# Altium PCB Mosfet_Driver_Circuit.PcbDoc
Units mm, origin at the board's own origin, x right, y up, seen from the top; angles counter-clockwise.
Board outline 99.57 x 123 mm, 2 copper layers (Top Layer, Bottom Layer); 76 components, 34 nets, 233 pads, 377 vias.
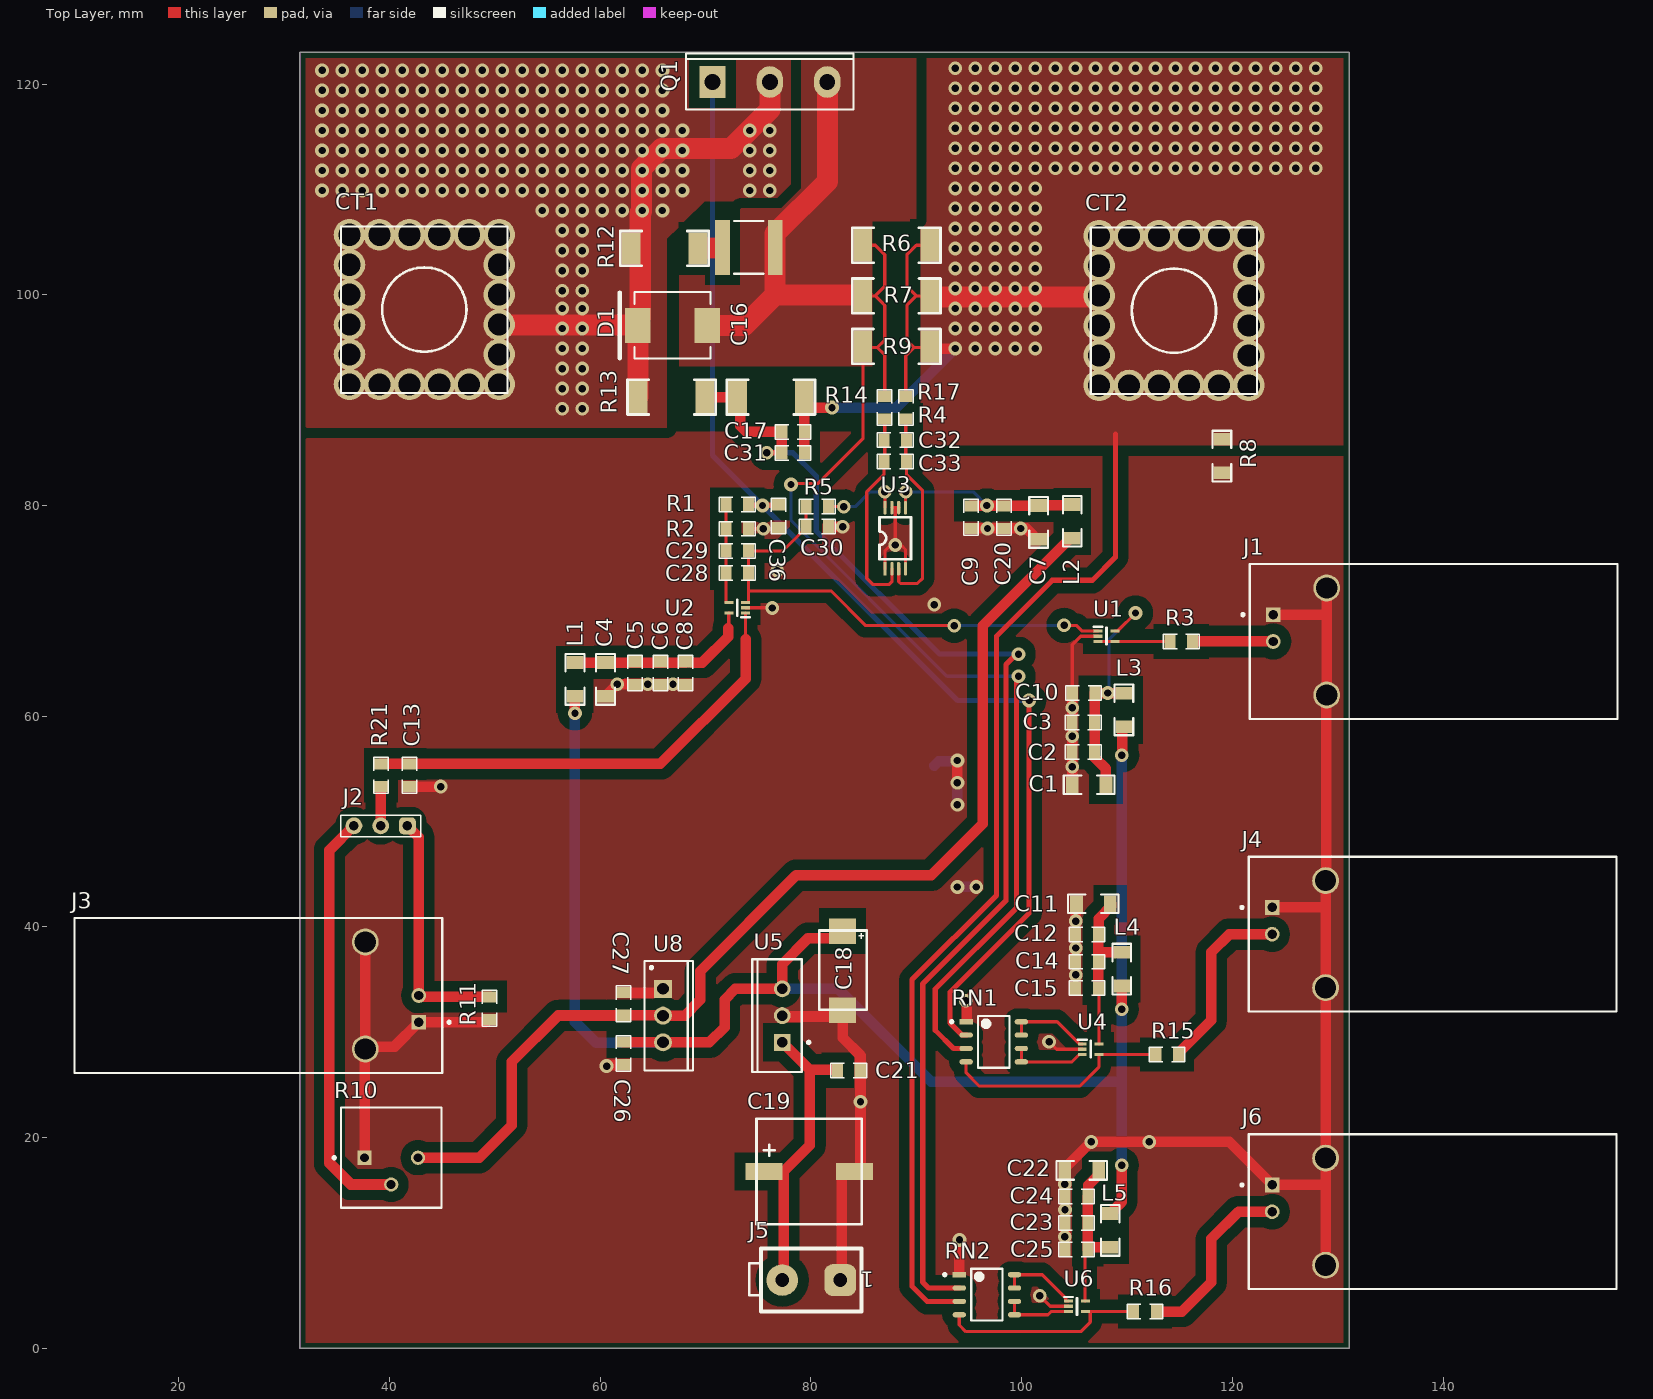
[diagram p0: Top Layer view]
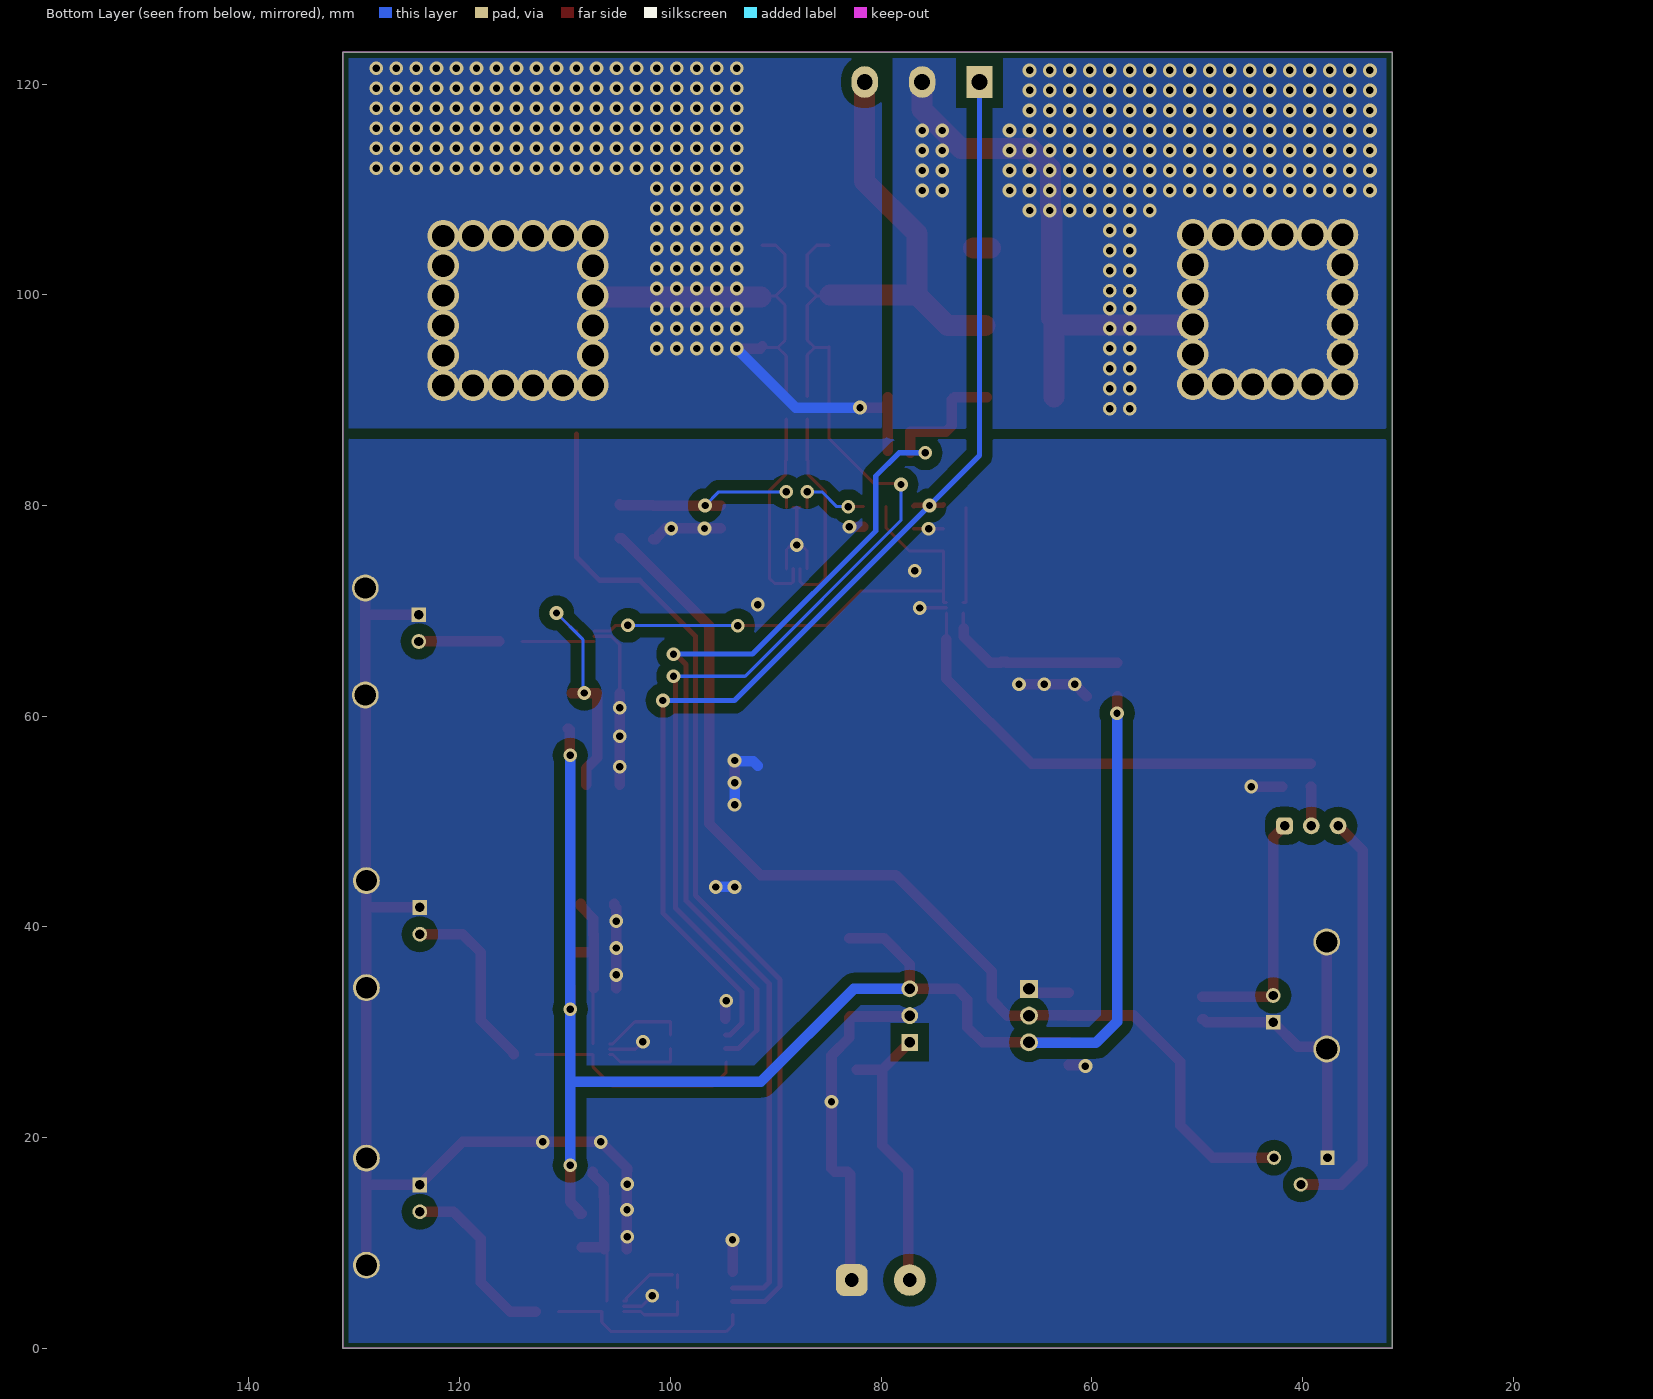
[diagram p1: Bottom Layer view, seen from below]
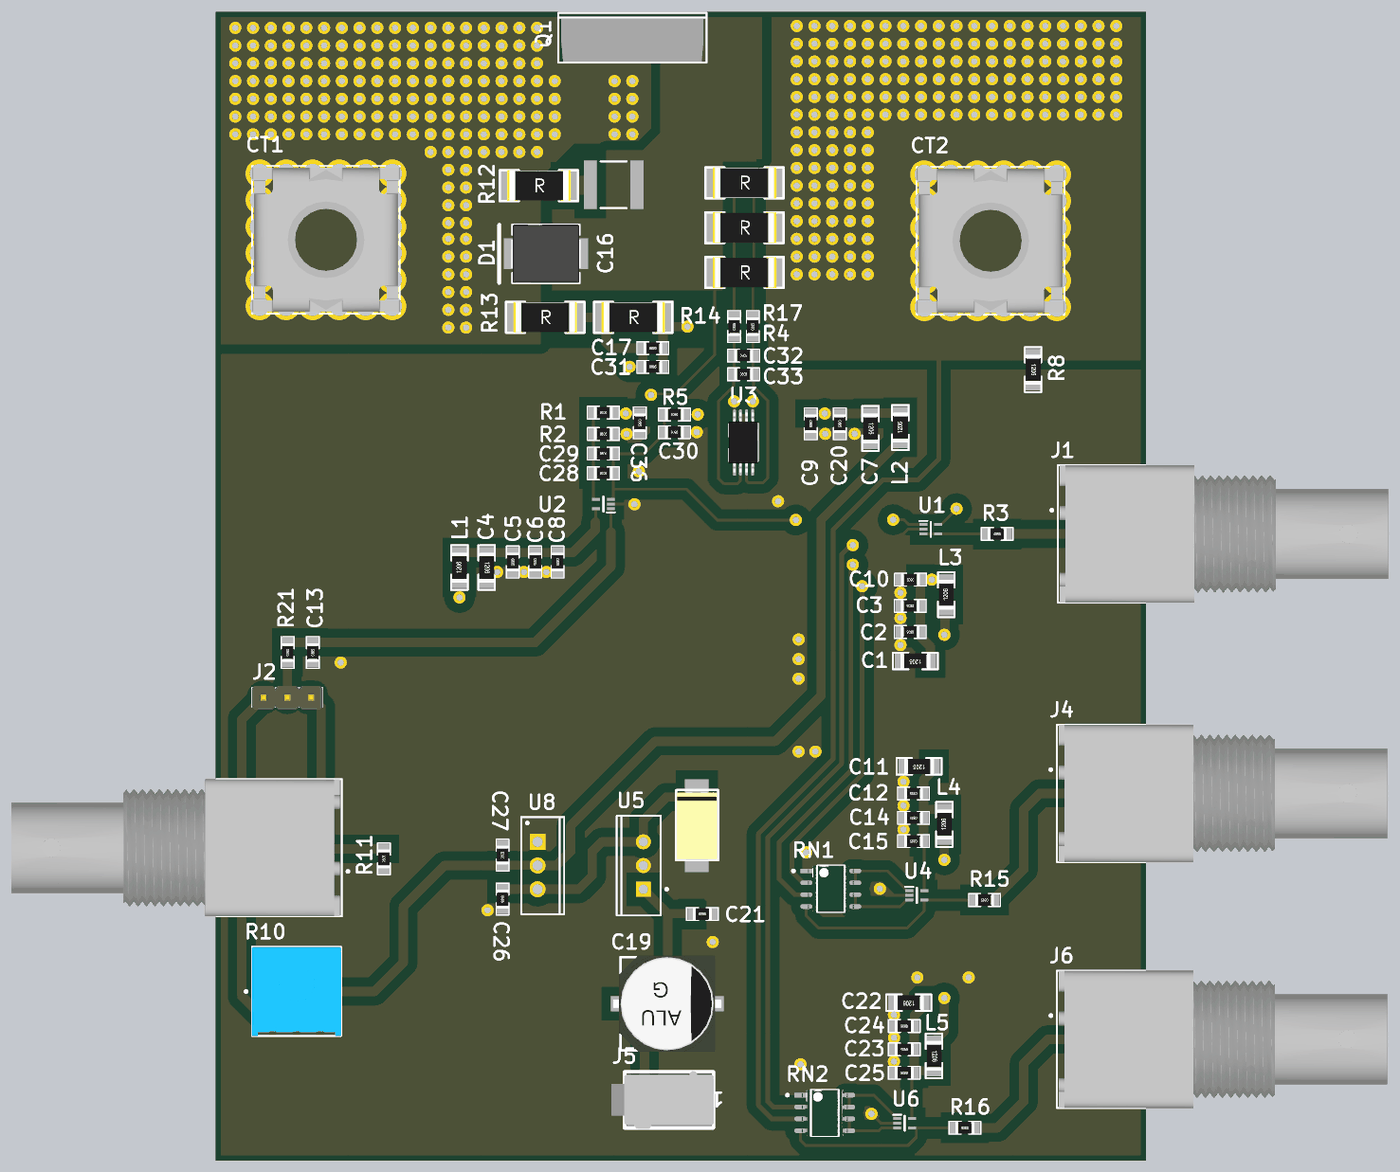
[diagram p2: 3D render of the assembled board from above, using the file's embedded part models]

## Layer stack, top to bottom
Top Solder: solder mask 0.0102, Solder Resist, Dk 3.5
Top Layer: signal copper 0.0356
Dielectric 1: dielectric 0.32, FR-4, Dk 4.8
Bottom Layer: signal copper 0.0356
Bottom Solder: solder mask 0.0102, Solder Resist, Dk 3.5

## Board outline
31.5,0 31.5,123 131.074,123 131.074,0

## Design rules (kind name [scope] priority, off if disabled: settings)
Clearance Keep-Poly [(OnLayer('Keep-Out Layer')) vs (InPoly)] p1: gap=0.5 ignorepadtopadclearanceinfootprint=FALSE
Clearance Polygon [All vs (InPoly)] p2: gap=1 ignorepadtopadclearanceinfootprint=FALSE
Clearance Keepout [All vs (OnLayer('Keep-Out Layer'))] p3: gap=0.5 ignorepadtopadclearanceinfootprint=FALSE
Clearance [All] p4: gap=0.2 ignorepadtopadclearanceinfootprint=FALSE
ComponentClearance [All] p1: gap=0.1 collisioncheckmode=3 verticalgap=0.2 showdistances=FALSE
FabricationTestPointUsage TestPointUsage [All] p1: valid=0 allowmultiple=FALSE
FabricationTestpoint Testpoint [All] p1: side=3 testpointundercomponent=TRUE minsize=1.016 maxsize=2.54 preferedsize=1.524 minholesize=0 maxholesize=1.016 preferedholesize=0.813 testpointgrid=0.025 allowsidetop=TRUE allowsidebottom=TRUE usegrid=TRUE gridtolerance=0
HoleSize [All] p1: absolutevalues=TRUE maxlimit=3.5 minlimit=0 maxpercent=80.000 minpercent=20.000
PlaneClearance [All] p1: clearance=1
PlaneConnect [All] p1: planeconnectstyle=Direct reliefexpansion=0.508 reliefentries=4 reliefconductorwidth=0.254 reliefairgap=0.254
PolygonConnect PolygonConnect_1 [InNet('BAT+')] p1: connectstyle=Direct reliefconductorwidth=0.254 reliefentries=4 polygonreliefangle="90 Angle" airgapwidth=0.254
PolygonConnect [All] p2: connectstyle=Direct reliefconductorwidth=0.8 reliefentries=4 polygonreliefangle="90 Angle" airgapwidth=0.254
RoutingVias [All] p1: holewidth=0.3 width=0.6 viastyle="Through Hole" minholewidth=0.3 minwidth=0.6 maxholewidth=0.8 maxwidth=1.3
SolderMaskExpansion [(IsVia)] p1: expansion=-10 istentingtop=FALSE
Width SGND [InNet('SGND')] p1: maxlimit=2 minlimit=0.3 preferedwidth=0.5 minimp=50.000000 maximp=50.000000 favimp=50.000000
Width PGND [InNet('PGND')] p2: maxlimit=3 minlimit=0.5 preferedwidth=0.5 minimp=50.000000 maximp=50.000000 favimp=50.000000
Width [All] p3: maxlimit=2 minlimit=0.2 preferedwidth=0.2 minimp=50.000000 maximp=50.000000 favimp=50.000000
24 further rules are at their usual default settings.

## Components (designator, comment, footprint, x,y, rotation, side; value= is the part's Value field where it differs from the comment)
C1 "10uF X7R 50V" 1206 106.4,53.5 r180 top
C2 "100nF X7R 100V" 0805 105.85,56.6 r180 top
C3 "1nF X7R 50V" 0805 105.85,59.4 r180 top
C4 "10uF X7R 50V" 1206 60.5,63.5 r270 top
C5 "100nF X7R 100V" 0805 63.3,64.1 r270 top
C6 "1nF X7R 50V" 0805 65.7,64.1 r270 top
C7 "10uF 50V" 1206 101.6,78.4 r270 top
C8 "10pF C0G" 0805 68.1,64.1 r270 top
C9 "100nF 100V" 0805 95.2,78.9 r270 top
C10 "10pF C0G" 0805 105.875,62.204 r180 top
C11 "10uF X7R 50V" 1206 106.8,42.2 r180 top
C12 "100nF X7R 100V" 0805 106.2,39.3 r180 top
C13 "100nF X7R 50V" 0805 41.9,54.4 r90 top
C14 "1nF X7R 50V" 0805 106.2,36.7 r180 top
C15 "10pF C0G" 0805 106.2,34.2 r180 top
C16 "3.3uF X7R 250V" 2220 74.1,104.5 r0 top
C17 "100nF X7R 100V" 0805 78.3,87 r0 top
C18 "22uF 25V" TANT_D 83,35.85 r90 top
C19 "220uF 50V" C_G55 79.83,16.791 r180 top
C20 "10pF" 0805 98.3,78.9 r270 top
C21 "1uF X7R 25V" 0805 83.6,26.4 r0 top
C22 "10uF X7R 50V" 1206 105.7,16.9 r180 top
C23 "100nF X7R 100V" 0805 105.2,11.9 r180 top
C24 "1nF X7R 50V" 0805 105.2,14.4 r180 top
C25 "10pF C0G" 0805 105.2,9.4 r180 top
C26 "100nF X7R 50V" 0805 62.2,28 r270 top
C27 "10uF X5R 10V" 0805 62.2,32.7 r90 top
C28 "1nF X7R 50V" 0805 73,73.6 r0 top
C29 "10pF C0G" 0805 73,75.7 r0 top
C30 "1nF X7R 50V" 0805 80.6,78 r180 top
C31 "1nF X7R 50V" 0805 78.3,85 r0 top
C32 "1nF X7R 50V" 0805 88,86.2 r0 top
C33 "10pF" 0805 88,84.2 r0 top
C36 "1nF X7R 50V" 0805 76.9,79 r270 top
CT1 "POWERPLUS F-M8" "PowerPlus M8" 43.3,98.6 r0 top
CT2 "POWERPLUS F-M8" "PowerPlus M8" 114.45,98.5 r0 top
D1 "SMCJ15A" LFUS-DO-214AB-2_V 66.85,97.1 r180 top
J1 "1-1337543-0" TECO-1-1337543-0_V 128.95,67.1 r270 top
J2 "STRIP-3" SIP-3 39.16,49.6 r180 top
J3 "1-1337543-0" TECO-1-1337543-0_V 37.7,33.5 r90 top
J4 "1-1337543-0" TECO-1-1337543-0_V 128.85,39.32 r270 top
J5 "M_FIT1X2" M_FIT_JR1X2V 80.03,6.491 r90 top
J6 "1-1337543-0" TECO-1-1337543-0_V 128.85,12.98 r270 top
L1 "80R 3A" 1206 57.6,63.5 r90 top
L2 "80R 3A" 1206 104.8,78.5 r90 top
L3 "80R 3A" 1206 109.7,60.6 r90 top
L4 "80R 3A" 1206 109.5,36 r90 top
L5 "80R 3A" 1206 108.4,11.2 r270 top
Q1 "IXTK90N25L2" TO-247 76.1,120.2 r0 top
R1 "100R" 0805 73,80.1 r0 top
R2 "47K" 0805 73,77.8 r0 top
R3 "50R" 0805 115.15,67.1 r180 top
R4 "100R" 0805 87,89.3 r90 top
R5 "100R" 0805 80.6,79.9 r180 top
R6 "5 mR" 2512 88.1,104.7 r0 top
R7 "5 mR" 2512 88.1,99.9 r0 top
R8 "10R" 1206 119,84.7 r270 top
R9 "5 mR" 2512 88.1,95.1 r0 top
R10 "3386P-1-104LF" BOUR-3386P 40.16,16.83 r0 top
R11 "47K" 0805 49.5,32.3 r90 top
R12 "1R5" 2512 66.1,104.4 r0 top
R13 "120K" 2512 66.775,90.3 r0 top
R14 "2K" 2512 76.2,90.3 r0 top
R15 "50R" 0805 113.8,27.9 r180 top
R16 "50R" 0805 111.7,3.5 r180 top
R17 "100R" 0805 89,89.3 r90 top
R21 "1K" 0805 39.2,54.4 r90 top
RN1 "AORN100-1AT5" FP-AORN100-1AT5-IPC_C 97.35,29.105 r0 top value=1/100kΩ
RN2 "AORN100-1AT5" FP-AORN100-1AT5-IPC_C 96.7,5.1 r0 top value=1/100kΩ
U1 "NCS20071" SOT-553-5 108.05,67.6 r0 top
U2 "NCS20071" SOT-553-5 73,70.3 r180 top
U3 "INA240" TSSOP-8 88,76.9 r90 top
U4 "NCS20071" SOT-553-5 106.55,28.4 r0 top
U5 "LM2940CT-9.0/NOPB" NDE0003A 77.28,31.59 r90 top
U6 "NCS20071" SOT-553-5 105.25,4 r0 top
U8 "LD1117V50" TO220 65.957,31.59 r270 top

## Footprints (in the part's own frame and the unit in brackets; to place one, negate y for a bottom-side part, rotate by r counter-clockwise, add the part's x,y. Pads: shape width x height; smd on the part's side, far side on the other; paste and mask are expansions set on the pad)
0805 [mm]
  rect 1.05x1.3 smd: 1(-1.075,0) 2(1.075,0)
  silkscreen extent -1.7,-0.69 1.7,0.69, body extent -1,-0.62 1,0.63, height 0.5
1206 [mm]
  rect 1.2x1.6 smd: 1(-1.6,0) 2(1.6,0)
  silkscreen extent -2.4,-0.89 2.4,0.89, body extent -1.6,-0.8 1.6,0.8, height 0.6
2220 [mm] "Chip Capacitor, Body 5.7x5.0mm, IPC High Density"
  rect 1.4x5.2 smd: 1(-2.5,0) 2(2.5,0)
  silkscreen extent -1.4,-2.5 1.4,2.5, body extent -2.95,-2.63 2.95,2.63, height 1.4
2512 [mil]
  rect 70x120 smd: 1(-125,0) 2(125,0)
  silkscreen extent -165,-65 165,65, body extent -134,-65 134,65, height 25
BOUR-3386P [mm] "THD, 3-Leads, Body 9.53x9.53mm, Pitch 2.54mm"
  rect 1.35x1.35 hole 0.85: 1(-2.54,1.27)
  round 1.35 hole 0.85: 2(0,-1.27) 3(2.54,1.27)
  silkscreen extent -5.54,-3.48 4.76,6.05, body extent -4.79,-3.52 4.79,6.06, height 4.95
C_G55 [mm]
  rect 3.5x1.6 smd: 1(4.3,0) 2(-4.3,0)
  silkscreen extent -5,-5 5,5, body extent -5.8,-5.15 5.8,5.15, height 10.2
FP-AORN100-1AT5-IPC_C [mm]
  rect 1.269x0.499 smd paste+0 mask+0: 1(-2.62,1.905)
  rrect100% 1.269x0.499 smd paste+0 mask+0: 2(-2.62,0.635) 3(-2.62,-0.635) 4(-2.62,-1.905) 5(2.62,-1.905) 6(2.62,-0.635) 7(2.62,0.635) 8(2.62,1.905)
  silkscreen extent -4.12,-2.46 1.49,2.46, body extent -3.35,-2.57 3.35,2.57, height 0.25
LFUS-DO-214AB-2_V [mm] "Molded Diode, 2-Leads, Body 7.11x6.22mm"
  rect 2.4x3.3 smd: 1(-3.3,0) 2(3.3,0)
  silkscreen extent -3.6,-3.15 5,3.15, body extent -3.77,-3.11 3.77,3.11, height 2.62
M_FIT_JR1X2V [mm]
  rrect50% 3x3 hole 1.3: 1(0,-2.75)
  round 3 hole 1.3: 2(0,2.75)
  silkscreen extent -3,-4.75 3,5.89, body extent -3.1,-4.8 3.1,6.2, height 12.8
NDE0003A [mm] "FM, 3-Leads, Body 10.7x4.7mm, Pitch 2.54mm"
  rect 1.6x1.6 hole 1: 1(-2.54,0)
  round 1.6 hole 1: 2(0,0) 3(2.54,0)
  silkscreen extent -5.35,-2.63 5.35,2.85, body extent -5.4,-1.9 5.4,2.9, height 19.4
"PowerPlus M8" [mm] "PowerPlus con vite M8"
  round 3 hole 2.1: 1(-7.1,-7.1) 1(-7.1,-4.26) 1(-7.1,-1.42) 1(-7.1,1.42) 1(-7.1,4.26) 1(-7.1,7.1) 1(-4.26,-7.1) 1(-4.26,7.1) 1(-1.42,-7.1) 1(-1.42,7.1) 1(1.42,-7.1) 1(1.42,7.1) 1(4.26,-7.1) 1(4.26,7.1) 1(7.1,-7.1) 1(7.1,-7.1) 1(7.1,-4.26) 1(7.1,-1.42) 1(7.1,1.42) 1(7.1,4.26) 1(7.1,7.1)
  silkscreen extent -7.9,-7.9 7.9,7.9, body extent -7.9,-7.7 7.92,7.7, height 12
SIP-3 [mm]
  rrect50% 1.6x1.6 hole 0.9: 1(-2.54,0)
  round 1.6 hole 0.9: 2(0,0) 3(2.54,0)
  silkscreen extent -3.81,-1.02 3.81,1.02, body extent -3.81,-1.24 3.81,1.3, height 10.1
SOT-553-5 [mm]
  rect 0.85x0.3 smd: 1(-0.8,0.5) 2(-0.8,0) 3(-0.8,-0.5) 4(0.8,-0.5) 5(0.8,0.5)
  silkscreen extent -1.22,-0.8 0.03,0.9
TANT_D [mm]
  rect 2.413x2.54 smd: 1(3.75,0) 2(-3.75,0)
  silkscreen extent -3.69,-2.29 3.81,2.21, body extent -3.65,-2.15 3.65,2.15, height 2.81
TECO-1-1337543-0_V [mm] "SMD, 2-Leads, Body 34.9x14.7mm, Pitch 2.54mm"
  rect 1.4x1.4 hole 0.89: 1(-2.54,-5.08)
  round 1.4 hole 0.89: 2(0,-5.08)
  round 2.55 hole 2.01: MH1(-5.08,0) MH2(5.08,0)
  silkscreen extent -7.35,-8.07 7.35,27.6, body extent -7.35,-7.1 7.35,28.05, height 15.8
TO220 [mm] "TO, Thru-Hole, Vertical, Heatsink Mounted; 3 In-Line Leads; Pitch 2.54 mm"
  rect 1.7x1.7 hole 1.1: 1(-2.54,0)
  round 1.7 hole 1.1: 2(0,0) 3(2.54,0)
  silkscreen extent -5.2,-1.75 5.2,2.85, body extent -5.25,-1.8 5.25,2.9, height 19.7
TO-247 [mm] "SIP with Mounting Hole; 3 Leads; Body 20 x 15.6 x 5 mm (typ); Pitch 5.45 mm"
  rect 2.5x3 hole 1.5: 1(-5.45,0)
  oval 2.5x3 hole 1.5: 2(0,0) 3(5.45,0)
  silkscreen extent -7.95,-2.6 7.95,2.7, body extent -7.62,-2.5 7.62,2.07, height 23.83
TSSOP-8 [mm]
  rect 1.3x0.3 smd: 1(-2.9,0.975)
  oval 1.3x0.3 smd: 2(-2.9,0.325) 3(-2.9,-0.325) 4(-2.9,-0.975) 5(2.9,-0.975) 6(2.9,-0.325) 7(2.9,0.325) 8(2.9,0.975)
  silkscreen extent -2,-1.5 2,1.5, body extent -3.2,-1.55 3.2,1.55, height 1.08

## Part data
C1 C4 C7 C11 C22: library part "CAP_10uF X7R 50V_1206", "Capacità", 1 Supplier Part Number=CL31B106KBHNNNE, ArSilicii Part Number=CPC0232011, 1 Supplier="ARROW ELECTRONICS ITALIA S.R.L.", ComponentLink1Description="Datasheet for 10uF X7R 25V", Manufacturer Part Number=CL31B106KBHNNNE, SMD/TH=SMD
C2 C5 C9 C12 C17 C23: library part "CAP_100nF X7R 100V_0805", "Capacità", 1 Supplier Part Number=CL21B104KCFSFNG, 2 Supplier Part Number=1907331, ArSilicii Part Number=CPC0213101, Manufacturer=SAMSUNG, 1 Supplier="ARROW ELECTRONICS ITALIA S.R.L.", 2 Supplier="FARNELL ITALIA S.R.L.", Manufacturer Part Number=CL21B104KCFSFNG, SMD/TH=SMD
C3 C6 C14 C24 C28 C30 C31 C32 C36: library part "CAP_1nF X7R 50V_0805", "Capacità", 1 Supplier Part Number=B37941K5102K60, 2 Supplier Part Number=0805B102K5CT, ArSilicii Part Number=CPC0213001, Manufacturer="EPCOS / TDK", 1 Supplier="DISTAR S.R.L.", 1 Supplier Unit Price=0,00235, 2 Supplier="ARROW ELECTRONICS ITALIA S.R.L.", Manufacturer Part Number=B37941K5102K60, SMD/TH=SMD
C8 C10 C15 C20 C25 C29 C33: library part "CAP_10pF C0G_0805", "Capacità", ArSilicii Part Number=CPC0614010, 1 Supplier Unit Price=0,09, SMD/TH=SMD
C13 C26: library part "CAP_100nF X7R 50V_0805", "Capacità", 1 Supplier Part Number=C0805C104K5RAC7800, 2 Supplier Part Number="08055C104KAT2A AVX", ArSilicii Part Number=CPC0213100, Manufacturer=Kemet, 1 Supplier="ARROW ELECTRONICS ITALIA S.R.L.", 1 Supplier Unit Price=0,00240, 2 Supplier="AVNET EMG ITALY S.R.L.", Manufacturer Part Number=C0805C104K5RAC7800, SMD/TH=SMD
C16: library part "CAP_1uF X7R 250V_2220", "Capacità", 1 Supplier Part Number=2435506, 2 Supplier Part Number=810-CGA9N3X7R2E105K, Manufacturer=TDK, Manufacturer Part Number=CGA9N3X7R2E105K230KA, 1 Supplier="FARNELL ITALIA S.R.L.", 1 Supplier Unit Price=0,606, 2 Supplier=MOUSER, 2 Supplier Unit Price=0,594, SMD/TH=SMD
C18: library part "CAP_TANT_22uF 25V Case D", "Capacità polarizzata", 1 Supplier Part Number=KETT491D226K025AT, ArSilicii Part Number=CPC0352022, Manufacturer=Kemet, Manufacturer Part Number=T491D226K025AT, 1 Supplier="DISTAR S.R.L.", 1 Supplier Unit Price=0,060, 2 Supplier="ABACUS ECC S.R.L. - UNIPERSONALE", 2 Supplier Part Number=KETT491D226K025AT, 3 Supplier="ARROW ELECTRONICS ITALIA S.R.L.", 3 Supplier Part Number=KETT491D226K025AT, SMD/TH=SMD
C19: library part "CAP_EL_220uF 50V", "Capacità polarizzata", 2 Supplier Part Number=5194346, ArSilicii Part Number=CPC0402221, Manufacturer=Nichicon, Manufacturer Part Number=UPS1H221MPD, 1 Supplier="ARROW ELECTRONICS ITALIA S.R.L.", 1 Supplier Unit Price=0,04516, 2 Supplier="RS COMPONENTS S.P.A.", ComponentLink1Description="Datasheet for 220uF 50V", ComponentLink1URL=http://docs-europe.electrocomponents.com/webdocs/0649/0900766b8064973a.pdf, SMD/TH=TH
C21: library part "CAP_1uF X7R 25V_0805", "Capacità", 1 Supplier Part Number=CL21B105KAFNNNG, ArSilicii Part Number=CPC0212002, Manufacturer=Samsung, 1 Supplier="AVNET EMG ITALY S.R.L.", Manufacturer Part Number=CL21B105KAFNNNG, SMD/TH=SMD
C27: library part "CAP_10uF X5R 10V_0805", "Capacità", 1 Supplier Part Number=CL21A106KPFNNNE, ArSilicii Part Number=CPC0212010, Manufacturer=Samsung, 1 Supplier="ARROW ELECTRONICS ITALIA S.R.L.", HelpURL=\\Sorp\articoli\CPC0212010\F3102_CerPerChar.pdf, Manufacturer Part Number=CL21A106KPFNNNE, SMD/TH=SMD
CT1 CT2: library part "PAD_POWERPLUS F-M8", "Singolo contatto", 1 Supplier Part Number=S98978, ArSilicii Part Number=QC04000180, Manufacturer=WURTH, Manufacturer Part Number=93517, 1 Supplier="Würth Elektronik ICS GmbH & Co. KG", SMD/TH=TH
D1: library part CMP-2000-07102-1, "Transient Voltage Suppression Diode, 15 V, -65 to 150 degC, 2-Pin DO-214AB (SMCJ), RoHS, Tape and Reel", Breakdown Voltage-Max=18.5V, Breakdown Voltage-Min=16.7V, Clamping Voltage-Max=24.4V, Manufacturer=Littelfuse, Package Description="2-Pin Surface Mount Device, Body 6.855 x 5.905 mm", Package Reference=DO-214AB, Power Dissipation=1500W, Datasheet URL=http://www.littelfuse.com/products/tvs-diodes/surface-mount/~/media/electronics/datasheets/tvs_diodes/littelfuse_tvs_diode_smcj_datasheet.pdf.pdf, Datasheet Version=11/2015, Directional=Uni-Directional, Manufacturer URL=http://www.littelfuse.com/, Mounting Technology=SurfaceMount
J1 J3 J4 J6: library part CMP-2000-05853-1, "Female Connector, Pitch 2.54 mm, 1 x 2 Position, Height 15.8 mm, Tail Length 3.8 mm,  / -55 to 85 degC, RoHS, Bulk", Frequency Max=4GHz, Manufacturer="TE Connectivity", Package Description="Female Connector, Pitch 2.54 mm, 1 x 2 Position, Height 15.8 mm, Tail Length 3.8 mm", Coaxial Cable Types=-, Coaxial Termination=Solder, Connector Body Style=RightAngleJack, Connector Mounting=PCBMount, Connector Type=BNCCoaxial, Contact Material=Brass, Contact Plating=GoldPlatedContacts, Datasheet URL=http://www.te.com/commerce/DocumentDelivery/DDEController?Action=showdoc&DocId=Customer+Drawing%7F1337543%7FG%7Fpdf%7FEnglish%7FENG_CD_1337543_G.pdf%7F1-1337543-0, Datasheet Version="Rev. G, 12/2012", Impedance=50ohm, Manufacturer URL=http://www.te.com/, Mounting Technology=ThroughHole, Package Reference=1-1337543-0, Product Range=-, SVHC=ToBeAdvised
J2: library part "HEADER 3", SMD/TH=TH
J5: "Mini Fit Junior 2 poli", ArSilicii Part Number=QA02006000, Manufacturer=Molex, Manufacturer Part Number=39-28-1023, 1 Supplier="ABACUS ECC S.R.L. - UNIPERSONALE", 1 Supplier Unit Price=0,07900, 2 Supplier="HT COMPONENTI ELETTRONICI S.R.L.", ComponentLink1Description="Datasheet for M_FIT1X2", ComponentLink1URL=http://www.molex.com/webdocs/datasheets/pdf/en-us/0039281023_PCB_HEADERS.pdf, SMD/TH=TH
L1 L2 L3 L4 L5: library part "Ferrite 80R 3A", "Ferrite", 1 Supplier Part Number=3275550P, ArSilicii Part Number=CPF0006000, Manufacturer="Wurth Elektronik", Manufacturer Part Number=74279215, Supplier Part Number 1=732-1629-1-ND, 1 Supplier="RS COMPONENTS S.P.A.", 1 Supplier Unit Price=0,21000, ComponentLink1Description="Datasheet for Ferrite 80R 3A", ComponentLink1URL=http://docs-europe.electrocomponents.com/webdocs/0033/0900766b80033a26.pdf, SMD/TH=SMD, Supplier 1=Digi-Key
Q1: "MOS CANALE N-250V-90A Linear", 1 Supplier Part Number=PB90N06S4-04, 2 Supplier Part Number=826-9042P, ArSilicii Part Number=CPTP200080, Manufacturer Part Number=IPB90N06S404ATMA2, 1 Supplier="EBV ELEKTRONIK S.R.L.", 1 Supplier Unit Price=0,56, 2 Supplier="RS COMPONENTS S.R.L.", SMD/TH=SMD
R1 R2 R3 R4 R5 R6 R7 R8 R9 R11 R12 R13 R14 R15 R16 R17 R21: library part RES_SMD, "Resistenza", SMD/TH=SMD
R10: library part CMP-2000-05592-1, "Square Trimpot(R) Trimming Potentiometer, 100 KOhm, +/- 10%, 0.5 W, -55 to 125 degC, 3-Pin THD, RoHS, Tube", Manufacturer=Bourns, Manufacturer Series=3386, Maximum Operating Temperature=125C, Minimum Operating Temperature=-55C, Operating Temperature-Max (Cel)=125, Operating Temperature-Min (Cel)=-55, Package=RectangularPackage, Package Description="3-Pin Through Hole Device, Body 9.53 x 9.53 mm, Pitch 2.54 mm", Package Reference=3386P, Power Rating=1/2W, Rated Power Dissipation (P) (W)=0.5, Rated Temperature (Cel)=85, Resistance (ohm)=100000, Resistance Law=Linear, Resistance Value=100KOhm, Resistive Element Material=Cermet, Temperature Coefficient=100ppm/C, Tolerance=10%, Tolerance (%)=10, Actuator Orientation=Vertical, Actuator Type=Screw, Datasheet URL=http://www.bourns.com/docs/Product-Datasheets/3386.pdf, Datasheet Version=05/2016, Family=3386, Lead Free=NO, Manufacturer URL=http://www.bourns.com/, Mounting=ThroughHole, Mounting Feature=ThroughHole, Mounting Technology=ThroughHole, Number of Terminals=3, Number of Turns=1, Packaging=Tube, Product Depth=9.53mm, Product Height=4.83mm, Product Length=9.53mm, Product Type=Potentiometer, Shaft Diameter=3.15mm, Technology=Cermet, Terminal Finish=TINLEAD, Terminal Shape=WIRE, Termination Style=Pin, Type=Trimmer
RN1 RN2: library part CMP-02406-000003-1, "RES NETWORK 4 RES MULT OHM 8SOIC", Manufacturer=Vishay, Number Of Resistors=4, Power Per Resistor=100mW, Power Rating=400mW, Resistance=1/100kΩ, Temperature="-55°C to +155°C", Temperature Coefficient=25ppm/°C, Temperature Range High=+155°C, Temperature Range Low=-55°C, Tolerance=0.1%, Automotive=Yes, Automotive Grade="Grade 0", Category=Res, ComponentLink2Description=Datasheet, ComponentLink2URL=https://www.vishay.com/docs/60127/aorn.pdf, Composition="Thin Film", Device Class L1="Passive Components", Device Class L2=Resistors, Device Class L3="Resistor Arrays", Digikey Description="RES NETWORK 4 RES MULT OHM 8SOIC", Height=1.73mm, Ipc Land Pattern Name=SOIC127P607X173-8, Lead Free=Yes, Manufacturer Part Number=AORN100-1AT5, Octopart=https://octopart.com/aorn1001at5-vishay-54384707, Package=AORN100-1AT5, RoHS=TRUE, Series=AORN, Standoff Height=0.1524mm, Termination=Gull-Wing
U1 U2 U4 U6: "Rail-to-Rail Input/Output, 3 MHz Op Amps", 1 Supplier Part Number=MCP6021-E/SN-ND, Manufacturer="Microchip Technology", Manufacturer Part Number=MCP6021-E/SN, 1 Supplier=DigiKey, 1 Supplier Unit Price=1,22, ComponentLink1Description="Datasheet for MCP6021", ComponentLink1URL=http://ww1.microchip.com/downloads/en/DeviceDoc/21685d.pdf, SMD/TH=SMD
U3: "Current sense amplifier", SMD/TH=SMD
U5: library part CMP-0062-02531-3, "1A Low Dropout Regulator, 3-pin TO-220, Pb-Free", Manufacturer="Texas Instruments", PackageTopMarking="NSUZXYTTE#*LM2940CT*-9.0 P+", PowerWise=N, ComponentLink1Description="Datasheet URL", ComponentLink1URL=http://www.ti.com/general/docs/lit/getliterature.tsp?genericPartNumber=LM2940C&fileType=pdf, CompType="LDO IC", PackageDescription="TO-220, Molded, 3 Lead, Straight", PackageReference=NDE0003A, PinCount=3, RoHS=Y
U8: library part CMP-0244-00472-1, "Fixed Low Drop Positive Voltage Regulator, 5V, 3-Pin TO-220", ComponentLink1Description="Manufacturer URL", ComponentLink1URL=http://www.st.com, ComponentLink2Description=Datasheet, ComponentLink2URL=http://www.st.com/internet/com/TECHNICAL_RESOURCES/TECHNICAL_LITERATURE/DATASHEET/CD00000544.pdf, ComponentLink3Description="Package Specification", ComponentLink3URL=http://www.st.com/internet/com/TECHNICAL_RESOURCES/TECHNICAL_LITERATURE/PACKAGE_INFORMATION/CD00004649.pdf, DatasheetVersion=1/11/2011, PackageDescription="TO, Thru-Hole, Vertical, Heatsink Mounted; 3 In-Line Leads; Pitch 2.54 mm", PackageReference=TO220, PackageVersion=ver3.0

## Via types
v1: diameter 1.3, hole 0.7, Top Layer to Bottom Layer, 377 vias

## Nets (pads, with @x,y where several pads share a name; then routed paths per layer and width w, separated by ;. In a path a pad name is that pad's centre, name@x,y a point inside that pad or via, vN(x,y) a via of type N, cw(c..) or ccw(c..) an arc to the next point about the centre after c; other vN are vias at no path point)
+5V0: C27.1 L2.1 R10.3 U8.2 | length 102.6
  Top Layer w1: R10.3@42.74,18.1 48.5,18.1 51.6,21.2 51.6,27.2 56,31.6 61.707,31.6 62.175,31.6 C27.1 65.921,31.625 U8.2 68.012,31.59 69.499,33.077 69.499,35.816 78.583,44.9 91.4,44.9 96.3,49.8 96.3,68.6 104.6,76.9 L2.1
+9V0: C18.1 C26.1 L1.1 L3.1 L4.1 L5.1 U5.3 U8.3 | length 152.8
  Top Layer w1: v1(57.6,60.3) L1.1 ; C26.1@62.2,29.05 U8.3 70.35,29.05 71.8,30.5 71.8,33.1 72.83,34.13 U5.3 77.28,36.48 79.72,38.92 C18.1@83.02,38.92 ; L5.1 108.6,12.8 108.7,12.9 108.7,13.1 109.5,13.9 v1(109.5,17.4) v1@109.491,17.391 ; v1(109.5,32.2) L4.1 ; v1(109.5,56.3) 109.557,56.357 109.557,58.72 109.657,58.82 L3.1@109.75,58.82
  Bottom Layer w1: v1(57.6,60.3) 57.6,31 59.6,29 65.907,29 U8.3 ; U5.3 82.57,34.13 91.4,25.3 109.5,25.3 ; v1(109.5,17.4) 109.5,25.3 ; v1(109.5,56.3) v1(109.5,32.2) 109.5,25.3
+12V0: C19.1 C21.1 J5.2 U5.1 | length 27.1
  Top Layer w1: J5.2 77.4,6.611 77.4,16.8 79.893,19.293 79.893,26.436 ; U5.1 79.893,26.436 ; C21.1@82.3,26.436 79.893,26.436
GND: C1.2 C2.2 C3.2 C4.2 C5.2 C6.2 C7.2 C8.2 C9.2 C10.2 C11.2 C12.2 C13.1 C14.2 C15.2 C18.2 C19.2 C20.2 C21.2 C22.2 C23.2 C24.2 C25.2 C26.2 C27.2 C30.1 C36.2 J1.1 J1.MH1 J1.MH2 J3.1 J3.MH1 J3.MH2 J4.1 J4.MH1 J4.MH2 J5.1 J6.1 J6.MH1 J6.MH2 R2.2 R8.2 R10.1 R11.1 RN1.1 RN2.1 U1.2 U2.2 U3.1 U3.4 U3.6 U3.7 U4.2 U5.2 U6.2 U8.1 | length 258.2
  Top Layer w0.3: U2.2 76.3,70.3 v1(76.325,70.275) ; R2.2 v1(75.487,77.8) C36.2@76.9,77.8 ; U3.1 87.025,75.725 v1@87.5,76.2 ; U3.7 88,79.8 ; v1(88,76.25) 88,79.8 ; U3.6 88,79.8 ; v1@88.6,76.2 88.975,75.825 U3.4 ; v1(101.7,5) 102.7,4 U6.2 ; v1(102.6,29.1) 103.3,28.4 U4.2 ; C10.2 104.8,66.8 105.6,67.6 U1.2
  Top Layer w1: R10.1 37.66,18.14 37.66,28.38 J3.MH1 ; J3.MH2 J3.MH1 ; C13.1 v1(44.875,53.325) ; R11.1 49.375,31.225 49.11,30.96 J3.1 40.475,28.655 37.935,28.655 J3.MH1 ; C4.2 v1(61.625,63.025) C5.2 v1(64.5,63.025) C6.2 v1(66.9,63.025) ; v1(60.6,26.8) 60.7,26.9 62.175,26.9 C26.2 ; C27.2 65.602,33.775 U8.1 ; U5.2 77.365,31.505 82.934,31.505 82.934,31.479 83.02,31.393 83.02,29.48 84.7,27.8 v1(84.7,23.4) 84.7,17.091 84.4,16.791 C19.2 83.2,16.791 82.9,16.491 82.9,6.611 J5.1 ; C30.1 v1(83,78) ; v1(93.9,53.7) v1(93.9,55.8) ; 94.08,7.3 94.08,10.18 94.1,10.2 v1(94.1,10.3) ; v1(94.7,33) 94.7,32.919 94.8,32.819 94.8,31.3 ; C9.2 v1(96.75,77.825) C20.2 v1(99.9,77.825) 100.45,77.825 101.036,77.239 101.036,77.164 101.4,76.8 C7.2 ; v1(95.7,43.8) v1@95.7,44 ; C25.2 104.113,9.413 v1(104.113,13.15) 104.113,16.887 C22.2 104.1,17.1 v1(106.6,19.6) v1(112.1,19.6) 119.69,19.6 J6.1 128.73,15.52 128.85,15.4 ; C1.2 C10.2 ; C15.2 v1(105.125,35.45) C14.2 v1(105.125,38) C12.2 v1(105.125,40.563) 105.125,41.825 105.3,42 C11.2@105.3,42.2 ; J4.1 128.81,41.86 128.85,41.9 ; J1.1 128.91,69.64 128.95,69.6 ; J6.MH2 128.85,15.4 ; J4.MH1 128.85,41.9 ; J4.MH1@128.9,44.45 128.9,61.97 J1.MH2 128.95,69.6 ; J1.MH1 128.95,69.6 ; 128.85,15.4 J6.MH1 J4.MH2 128.85,41.9
  Bottom Layer w1: U8.1 U8.1@66.004,34.177 ; 91.7,55.3 92.143,55.743 93.843,55.743 v1(93.9,55.8) ; v1(93.9,43.8) v1(95.7,43.8) ; v1(93.9,51.6) v1(93.9,53.7)
  other v1: 104.1,10.6 104.1,15.6 104.8,55.2 104.8,58.1 104.8,60.8 91.7,70.6 76.8,73.8
NetC1_1: C1.1 C2.1 C3.1 C10.1 L3.2 U1.5 | length 22.9
  Top Layer w0.3: U1.5 109.125,68.1 110.8,69.775 v1(110.8,69.8)
  Top Layer w1: C1.1 108,55 106.95,56.05 C10.1 v1(108.158,62.204) L3.2@109.366,62.204
  Bottom Layer w0.3: v1(108.158,62.204) 108.3,62.346 108.3,67.3 v1(110.8,69.8)
NetC4_1: C4.1 C5.1 C6.1 C8.1 L1.2 U2.5 | length 17.7
  Top Layer w0.3: 72.2,68.5 U2.5
  Top Layer w1: L1.2 C4.1 63.3,65.1 65.7,65.1 C8.1@68.1,65.1 ; C8.1@68.1,65.15 68.593,65.15 68.643,65.1 69.7,65.1 72.136,67.536 72.136,68.364
NetC7_1: C7.1 C9.1 C20.1 L2.2 U3.5 | length 19.4
  Top Layer w0.3: U3.5 88.975,81.275 v1(89,81.3)
  Top Layer w1: C9.1 95.325,79.975 95.35,80 v1(96.7,80) C7.1 101.65,80.05 104.75,80.05 L2.2
  Bottom Layer w0.3: v1(89,81.3) 95.4,81.3 v1(96.7,80)
NetC11_1: C11.1 C12.1 C14.1 C15.1 L4.2 U4.5 | length 16.1
  Top Layer w0.3: C15.1 107.35,34.125 U4.5
  Top Layer w1: C15.1 C14.1 107.275,37.6 ; C11.1@108.5,42.2 108.5,42 107.3,40.8 107.3,39.325 C12.1 107.275,37.6 ; L4.2 107.275,37.6
NetC13_2: C13.2 R21.2 U2.1 | length 44.2
  Top Layer w0.3: 73.8,67.3 U2.1
  Top Layer w1: R21.2 C13.2 65.708,55.475 73.8,63.567 73.8,67.3
NetC16_1: C16.1 R12.2 | length 1.6
  Top Layer w2: R12.2@69.6,104.45 C16.1@71.2,104.45
NetC22_1: C22.1 C23.1 C24.1 C25.1 L5.2 U6.5 | length 15
  Top Layer w0.3: U6.5 106.025,4.5 106.025,9.15 C25.1
  Top Layer w1: C25.1 C25.1@106.275,9.525 ; C22.1@107.35,16.75 107.35,16.55 106.3,15.5 106.3,14.425 C24.1 C23.1 C25.1@106.275,9.525 ; L5.2 106.35,9.6 C25.1@106.275,9.525
NetC28_1: C28.1 C29.1 R1.1 R2.1 U2.4 | length 9.3
  Top Layer w0.3: R1.1@71.925,79.8 C29.1 C28.1 71.925,70.8 U2.4
NetC32_1: C32.1 C33.1 R4.1 U3.2 | length 19.8
  Top Layer w0.3: R4.1 87,86.2 87,84.275 C33.1 86.925,82.925 85.3,81.3 85.3,73.1 85.9,72.5 87.4,72.5 87.675,72.775 U3.2
NetC32_2: C32.2 C33.2 R17.1 U3.3 | length 19.6
  Top Layer w0.3: U3.3 88.325,72.776 88.501,72.6 90.1,72.6 90.6,73.1 90.6,81.4 89.075,82.925 C33.2 89,84.275 89,86.2 R17.1
NetCT1_1: CT1.1 D1.2 Q1.2 R12.1 R13.1 | length 51.9
  Top Layer w2: CT1.1@50.4,97.18 50.44,97.14 63.51,97.14 D1.2 ; R13.1 63.575,90.325 63.575,97.075 D1.2 ; v1@65.8,113.9 63.9,112 63.9,107.889 63.795,107.785 63.795,97.795 63.55,97.55 D1.2 ; v1@66.1,113.9 72.4,113.9 76.1,117.6 Q1.2
  other v1: 56.4,89.2 58.3,89.2 56.4,91.1 58.3,91.1 56.4,93 58.3,93 56.4,94.9 58.3,94.9 56.4,96.8 58.3,96.8 56.4,98.7 58.3,98.7 56.4,100.4 58.3,100.4 56.4,102.3 58.3,102.3 56.4,104.2 58.3,104.2 56.4,106.1 58.3,106.1 54.5,108 56.4,108 58.3,108 60.2,108 62.1,108 64,108 65.9,108 33.6,109.9 35.5,109.9 37.4,109.9 39.3,109.9 41.2,109.9 43.1,109.9 45,109.9 46.9,109.9 48.8,109.9 50.7,109.9 52.6,109.9 54.5,109.9 56.4,109.9 58.3,109.9 60.2,109.9 62.1,109.9 64,109.9 65.9,109.9 67.8,109.9 74.2,109.9 76.1,109.9 33.6,111.8 35.5,111.8 37.4,111.8 39.3,111.8 41.2,111.8 43.1,111.8 45,111.8 46.9,111.8 48.8,111.8 50.7,111.8 52.6,111.8 54.5,111.8 56.4,111.8 58.3,111.8 60.2,111.8 62.1,111.8 64,111.8 65.9,111.8 67.8,111.8 74.2,111.8 76.1,111.8 33.6,113.7 35.5,113.7 37.4,113.7 39.3,113.7 41.2,113.7 43.1,113.7 45,113.7 46.9,113.7 48.8,113.7 50.7,113.7 52.6,113.7 54.5,113.7 56.4,113.7 58.3,113.7 60.2,113.7 62.1,113.7 64,113.7 65.9,113.7 67.8,113.7 74.2,113.7 76.1,113.7 33.6,115.6 35.5,115.6 37.4,115.6 39.3,115.6 41.2,115.6 43.1,115.6 45,115.6 46.9,115.6 48.8,115.6 50.7,115.6 52.6,115.6 54.5,115.6 56.4,115.6 58.3,115.6 60.2,115.6 62.1,115.6 64,115.6 65.9,115.6 67.8,115.6 74.2,115.6 76.1,115.6 33.6,117.5 35.5,117.5 37.4,117.5 39.3,117.5 41.2,117.5 43.1,117.5 45,117.5 46.9,117.5 48.8,117.5 50.7,117.5 52.6,117.5 54.5,117.5 56.4,117.5 58.3,117.5 60.2,117.5 62.1,117.5 64,117.5 65.9,117.5 33.6,119.4 35.5,119.4 37.4,119.4 39.3,119.4 41.2,119.4 43.1,119.4 45,119.4 46.9,119.4 48.8,119.4 50.7,119.4 52.6,119.4 54.5,119.4 56.4,119.4 58.3,119.4 60.2,119.4 62.1,119.4 64,119.4 65.9,119.4 33.6,121.3 35.5,121.3 37.4,121.3 39.3,121.3 41.2,121.3 43.1,121.3 45,121.3 46.9,121.3 48.8,121.3 50.7,121.3 52.6,121.3 54.5,121.3 56.4,121.3 58.3,121.3 60.2,121.3 62.1,121.3 64,121.3 65.9,121.3
NetJ1_2: J1.2 R3.1 | length 7.6
  Top Layer w1: R3.1 J1.2
NetJ2_1: J2.1 J3.2 R11.2 | length 23.3
  Top Layer w1: J2.1 42.78,48.52 J3.2 42.888,33.5 43.013,33.375 R11.2
NetJ2_2: J2.2 R21.1 | length 3.7
  Top Layer w1: J2.2 39.18,49.62 39.18,53.305 R21.1
NetJ2_3: J2.3 R10.2 | length 39.7
  Top Layer w1: J2.3 34.3,47.28 34.3,17.6 36.34,15.56 R10.2
NetJ4_2: J4.2 R15.1 | length 17.5
  Top Layer w1: R15.1 114.875,28.025 118,31.15 118,37.6 119.72,39.32 J4.2
NetJ6_2: J6.2 R16.1 | length 17.3
  Top Layer w1: R16.1 115.2,3.5 118,6.3 118,10.4 120.58,12.98 J6.2
NetR3_2: R3.2 U1.3 U1.4 | length 6.8
  Top Layer w0.3: U1.3 U1.4 R3.2
NetR5_1: R5.1 U3.8 | length 7.4
  Top Layer w0.3: R5.1 v1(83.1,79.9) ; v1(87,81.3) 87.025,81.275 U3.8
  Bottom Layer w0.3: v1(83.1,79.9) 84.2,79.9 85.6,81.3 v1(87,81.3)
NetR15_2: R15.2 RN1.4 U4.4 | length 21.5
  Top Layer w0.3: RN1.4 94.7,27.17 94.7,26.2 96,24.9 105.5,24.9 107.35,26.75 U4.4 R15.2
NetR16_2: R16.2 RN2.4 U6.4 | length 19.1
  Top Layer w0.3: RN2.4 94.08,2.22 94.7,1.6 105.6,1.6 106.5,2.5 106.5,3.5 R16.2
NetRN1_5: RN1.5 RN1.6 U4.3 | length 7.3
  Top Layer w0.3: RN1.6 RN1.5 104.775,27.2 105.475,27.9 U4.3
NetRN1_7: RN1.7 RN1.8 U4.1 | length 7.9
  Top Layer w0.3: RN1.7 RN1.8 103.365,31.01 105.475,28.9 U4.1
NetRN2_5: RN2.5 RN2.6 U6.3 | length 6.5
  Top Layer w0.3: RN2.6 RN2.5 102.495,3.195 102.8,3.5 U6.3
NetRN2_7: RN2.7 RN2.8 U6.1 | length 7.1
  Top Layer w0.3: RN2.7 RN2.8 ; RN2.8@99.815,7 101.95,7 104.175,4.775 104.175,4.5 U6.1
Out_Current: C28.2 C29.2 C30.2 R5.2 U1.1 U2.3 | length 48.3
  Top Layer w0.3: U2.3 74.075,70.8 74.075,71.9 ; R5.2 C30.2 79.525,77.875 77.35,75.7 C29.2 C28.2 74.075,71.9 ; v1(93.6,68.6) 85.2,68.6 81.9,71.9 74.075,71.9 ; v1(104.025,68.625) 105.175,68.625 105.7,68.1 U1.1
  Bottom Layer w0.3: v1(93.6,68.6) 104,68.6 v1(104.025,68.625)
Power_N: C17.2 C31.2 CT2.1 R6.2 R7.2 R8.1 R9.2 R14.2 R17.2 RN2.3 | length 156.7
  Top Layer w0.3: R17.2 89,94.2 89.8,95 ; R9.2 91.175,95 89.8,95 ; R7.2 90,99.9 ; R6.2 90,104.7 89.1,103.8 89.1,100.8 90,99.9 ; 89.8,95 89.1,95.7 89.1,99 90,99.9
  Top Layer w0.5: RN2.3 91.035,4.465 89.6,5.9 89.6,35 97.6,43 97.6,67.6 102.9,72.9 106.7,72.9 108.9,75.1 108.9,86.8
  Top Layer w1: C31.2@79.375,85.225 C17.2 R14.2@79.375,89.689 ; R14.2 R14.2@79.375,89.689 ; v1(82,89.3) 79.764,89.3 R14.2@79.375,89.689 ; R9.2 91.475,94.9 v1(93.7,94.9)
  Top Layer w2: R7.2@91.375,99.8 CT2.1@107.35,99.8
  Bottom Layer w1: v1(82,89.3) 88.1,89.3 v1(93.7,94.9)
  other v1: 95.6,94.9 97.5,94.9 99.4,94.9 101.3,94.9 93.7,96.8 95.6,96.8 97.5,96.8 99.4,96.8 101.3,96.8 93.7,98.7 95.6,98.7 97.5,98.7 99.4,98.7 101.3,98.7 93.7,100.6 95.6,100.6 97.5,100.6 99.4,100.6 101.3,100.6 93.7,102.5 95.6,102.5 97.5,102.5 99.4,102.5 101.3,102.5 93.7,104.4 95.6,104.4 97.5,104.4 99.4,104.4 101.3,104.4 93.7,106.3 95.6,106.3 97.5,106.3 99.4,106.3 101.3,106.3 93.7,108.2 95.6,108.2 97.5,108.2 99.4,108.2 101.3,108.2 93.7,110.1 95.6,110.1 97.5,110.1 99.4,110.1 101.3,110.1 93.7,112 95.6,112 97.5,112 99.4,112 101.3,112 103.2,112 105.1,112 107,112 108.9,112 110.8,112 112.7,112 114.6,112 116.5,112 118.4,112 120.3,112 122.2,112 124.1,112 126,112 127.9,112 93.7,113.9 95.6,113.9 97.5,113.9 99.4,113.9 101.3,113.9 103.2,113.9 105.1,113.9 107,113.9 108.9,113.9 110.8,113.9 112.7,113.9 114.6,113.9 116.5,113.9 118.4,113.9 120.3,113.9 122.2,113.9 124.1,113.9 126,113.9 127.9,113.9 93.7,115.8 95.6,115.8 97.5,115.8 99.4,115.8 101.3,115.8 103.2,115.8 105.1,115.8 107,115.8 108.9,115.8 110.8,115.8 112.7,115.8 114.6,115.8 116.5,115.8 118.4,115.8 120.3,115.8 122.2,115.8 124.1,115.8 126,115.8 127.9,115.8 93.7,117.7 95.6,117.7 97.5,117.7 99.4,117.7 101.3,117.7 103.2,117.7 105.1,117.7 107,117.7 108.9,117.7 110.8,117.7 112.7,117.7 114.6,117.7 116.5,117.7 118.4,117.7 120.3,117.7 122.2,117.7 124.1,117.7 126,117.7 127.9,117.7 93.7,119.6 95.6,119.6 97.5,119.6 99.4,119.6 101.3,119.6 103.2,119.6 105.1,119.6 107,119.6 108.9,119.6 110.8,119.6 112.7,119.6 114.6,119.6 116.5,119.6 118.4,119.6 120.3,119.6 122.2,119.6 124.1,119.6 126,119.6 127.9,119.6 93.7,121.5 95.6,121.5 97.5,121.5 99.4,121.5 101.3,121.5 103.2,121.5 105.1,121.5 107,121.5 108.9,121.5 110.8,121.5 112.7,121.5 114.6,121.5 116.5,121.5 118.4,121.5 120.3,121.5 122.2,121.5 124.1,121.5 126,121.5 127.9,121.5
Power_P: C17.1 C31.1 R13.2 R14.1 RN2.2 | length 115.6
  Top Layer w0.5: v1(75.8,85) C31.1 ; RN2.2 91.165,5.735 90.6,6.3 90.6,34.6 98.5,42.5 98.5,64.9 99.5,65.9 v1(99.7,65.9)
  Top Layer w1: R13.2 R14.1 73.28,90.045 73.28,87.586 73.865,87 C17.1 C31.1
  Bottom Layer w0.5: v1(75.8,85) 78.3,85 80.5,82.8 80.5,77.6 92.2,65.9 v1(99.7,65.9)
VG: C36.1 Q1.1 R1.2 RN1.2 | length 113.9
  Top Layer w0.5: R1.2 74.15,80.025 76.825,80.025 C36.1@76.9,79.95 ; RN1.2 94.346,29.74 93.2,30.886 93.2,33.8 100.7,41.3 v1(100.7,61.5)
  Bottom Layer w0.5: Q1.1 70.65,84.75 v1(75.4,80) 93.9,61.5 v1(100.7,61.5) v1@100.575,61.625
VS: C16.2 D1.1 Q1.3 R4.2 R6.1 R7.1 R9.1 RN1.3 | length 147
  Top Layer w0.3: v1(78.1,82) 78.2,82.1 80.7,82.1 84.925,86.325 R9.1 85.025,95 86.3,95 ; R7.1@84.825,100 R7.1 86.1,99.9 ; R6.1 86.1,104.7 87,103.8 87,100.8 86.1,99.9 ; R4.2 87,94.3 86.3,95 ; 86.1,99.9 87,99.001 87,95.7 86.3,95
  Top Layer w0.5: RN1.3 93.53,28.47 91.8,30.2 91.8,34.1 99.5,41.8 v1@99.5,63.8
  Top Layer w2: D1.1 73.7,97.1 76.6,100 ; Q1.3 81.55,110.75 76.6,105.8 C16.2 76.6,100 ; R7.1@84.825,100 76.6,100
  Bottom Layer w0.3: v1(78.1,82) 78.1,78.6 92.903,63.797 99.697,63.797 v1(99.7,63.8)

## Polygon pours and split planes (outlines as drawn)
GND on Bottom Layer "NONET_L-01_P-001" (solid, pour order 10): 131.074,87 131.074,0 31.5,0 31.5,87 31.6,87
NetCT1_1 on Bottom Layer "NONET_L-01_P-001" (solid, pour order 8): 31.5,123 78.9,123 78.9,87.301 31.5,87.299
Power_N on Bottom Layer "NONET_L-01_P-001" (solid, pour order 9): 79.3,123 131.074,123 131.074,87.327 79.3,87.324
no net on Bottom Layer "NONET_L-01_P-001" (solid, pour order 1): 87.2,98
GND on Top Layer "NONET_L-01_P-001" (solid, pour order 7): 131.074,87 131.074,0 31.5,0 31.5,87 31.6,87
NetCT1_1 on Top Layer "NONET_L-01_P-001" (solid, pour order 4): 69.9,108.9 71.2,108.9 76.9,108.9 78.5,110.5 78.5,123 31.5,123 31.5,87.399 66.3,87.401 66.3,105.3
Power_N on Top Layer "NONET_L-01_P-001" (solid, pour order 5): 90.4,123 90.4,85.7 131.066,85.7 131.066,123
VS on Top Layer "NONET_L-01_P-001" (solid, pour order 3): 85.8,107 90,107 90,123 85.8,123 79.8,123 79.1,123 79.1,110.1 77.2,108.2 70.5,108.2 67.5,105.2 67.5,93.2 85.8,93.2

## Keep-outs
Keep-Out Layer:
  the board outline again, w0.1

## Text inside footprints (layer, text, board x,y; h text height)
J5: Top Overlay "1" at 86.03,7.29 h1.5 r180